# Altium PCB suntile.PcbDoc
Units mm, origin at the board's own origin, x right, y up, seen from the top; angles counter-clockwise.
Board outline 63 x 33.05 mm, 2 copper layers (Top Layer, Bottom Layer), stack 0.325 mm thick; 140 components, 34 nets, 335 pads, 200 vias.
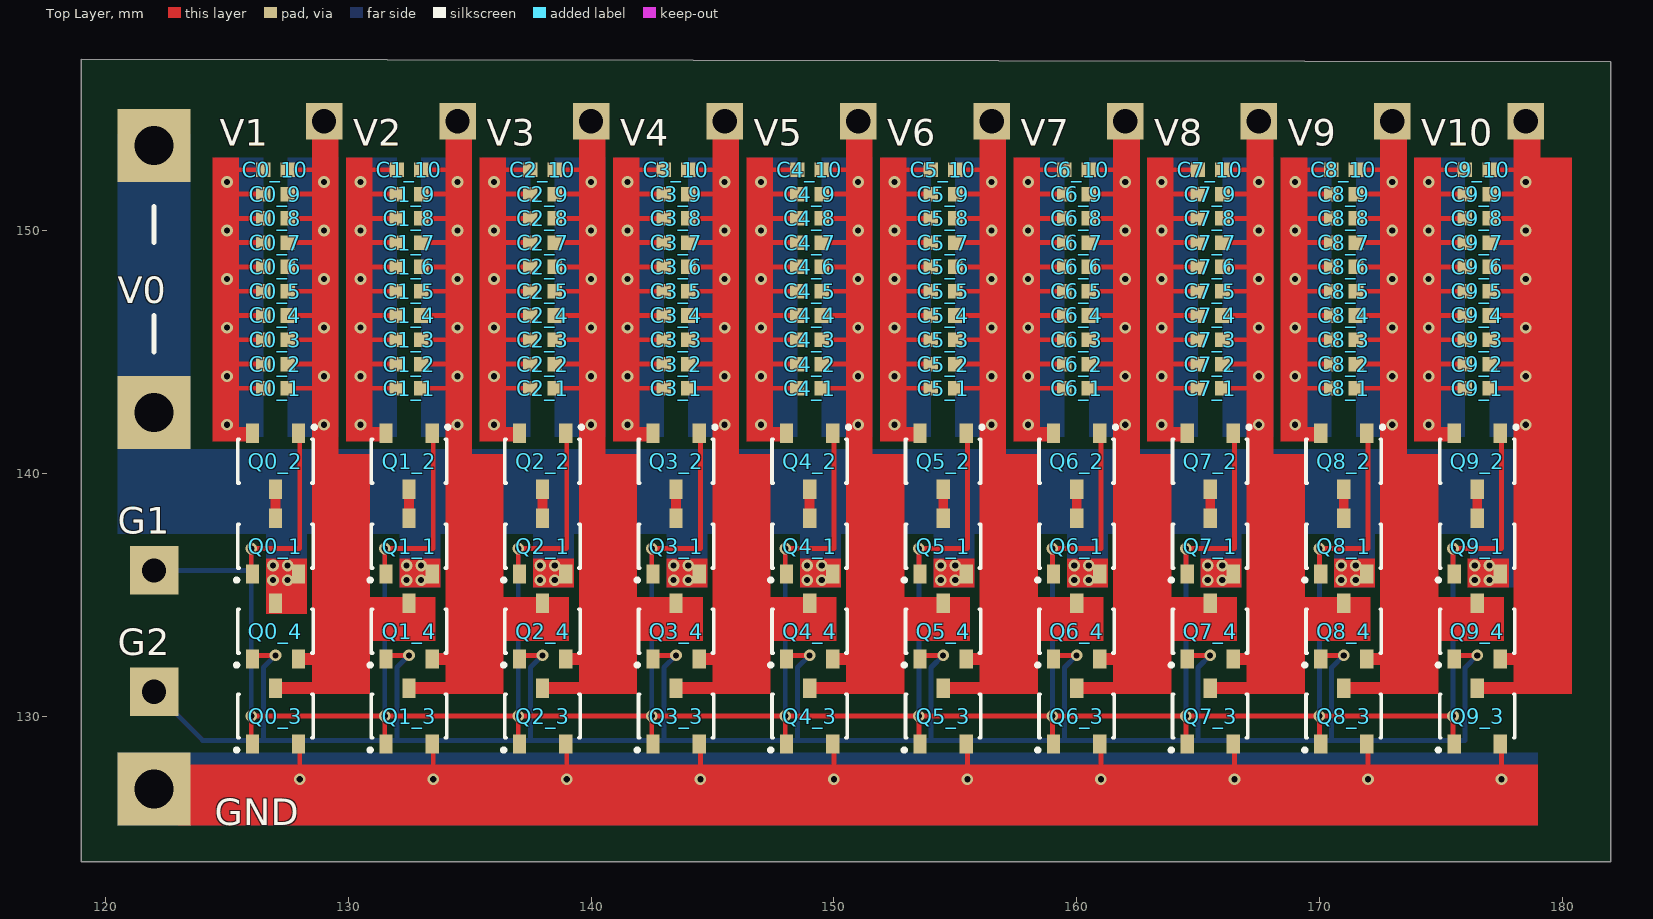
[diagram p0: Top Layer view]
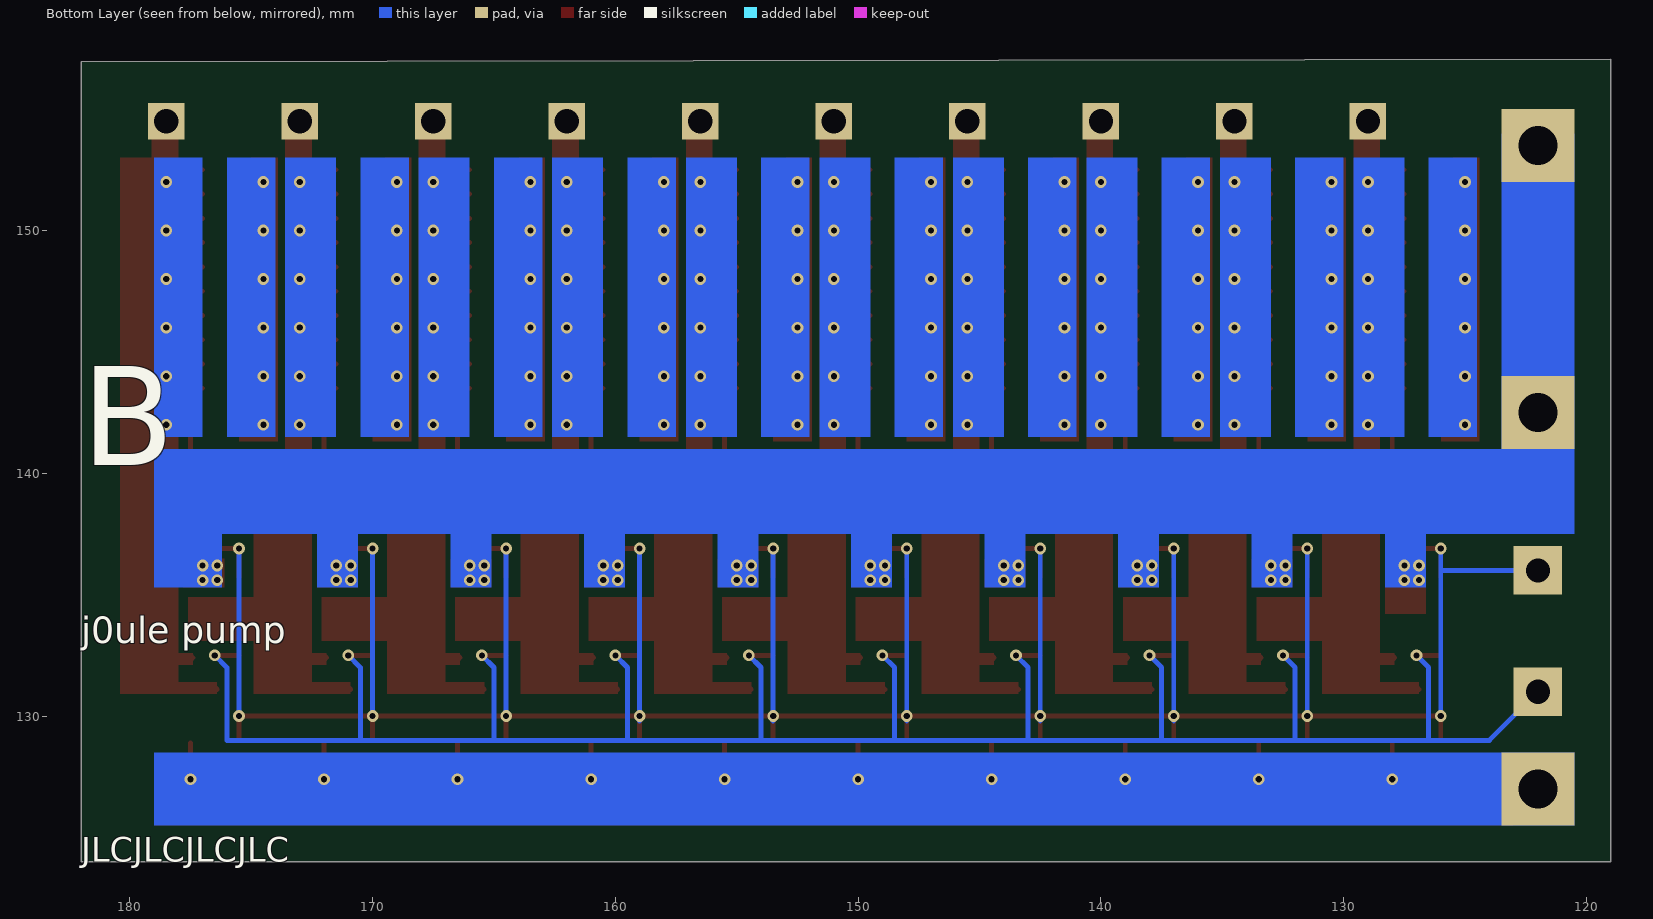
[diagram p1: Bottom Layer view, seen from below]
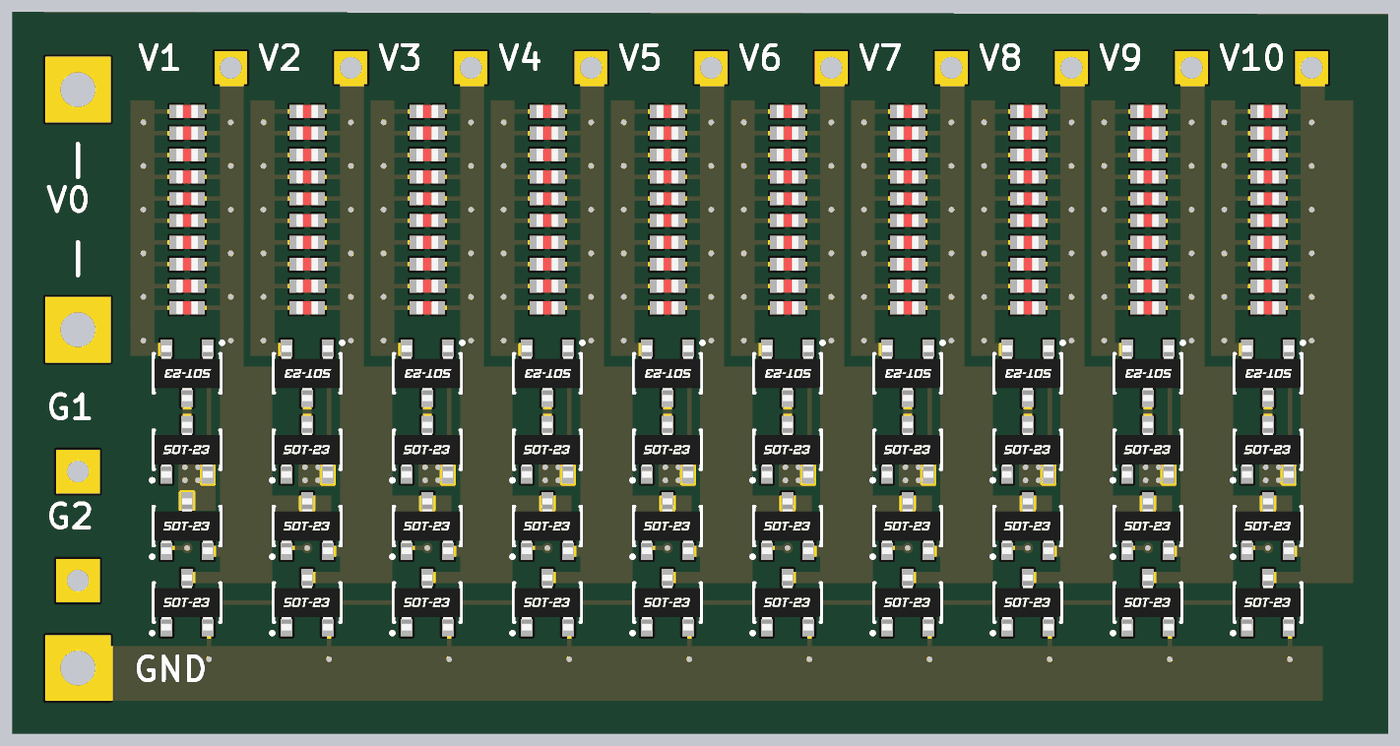
[diagram p2: 3D render of the assembled board from above, using the file's embedded part models]

## Layer stack, top to bottom
Top Solder: solder mask 0.0102, Solder Resist, Dk 3.5
Top Layer: signal copper 0.0356
Dielectric 1: core 0.254, FR-4, Dk 4.2
Bottom Layer: signal copper 0.0356
Bottom Solder: solder mask 0.0102, Solder Resist, Dk 3.5

## Board outline
119,124 182,124 182,156.951 119,157.054

## Design rules (kind name [scope] priority, off if disabled: settings)
Clearance [All] p1: gap=0.2 ignorepadtopadclearanceinfootprint=FALSE except(0: Arc-Hole Track-Hole SMDPad-Hole THPad-Hole Via-Hole Fill-Hole Poly-Hole Region-Hole Text-Hole)
PolygonConnect [All] p1: thpad.connectstyle=Relief thpad.reliefconductorwidth=0.254 thpad.reliefentries=4 thpad.polygonreliefangle="90 Angle" thpad.airgapwidth=0.254 smdpad.connectstyle=Relief smdpad.reliefconductorwidth=0.254 smdpad.reliefentries=4 smdpad.polygonreliefangle="90 Angle" smdpad.airgapwidth=0.254 via.connectstyle=Direct via.reliefconductorwidth=0.254 via.reliefentries=4 via.polygonreliefangle="90 Angle" via.airgapwidth=0.254
RoutingVias [All] p1: holewidth=0.711 width=1.27 viastyle="Through Hole" minholewidth=0.711 minwidth=1.27 maxholewidth=0.711 maxwidth=1.27
SolderMaskExpansion [All] p1: expansion=0.102
Width [All] p1: maxlimit=1 minlimit=0.2 preferedwidth=0.2 minimp=50.000000 maximp=50.000000 favimp=50.000000
30 further rules are at their usual default settings.

## Components (designator, comment, footprint, x,y, rotation, side; value= is the part's Value field where it differs from the comment)
C0_1 "CL05A106MQ5NUNC" C_0402 127,143.5 r180 top value=10uF
C0_2 "CL05A106MQ5NUNC" C_0402 127,144.5 r180 top value=10uF
C0_3 "CL05A106MQ5NUNC" C_0402 127,145.5 r180 top value=10uF
C0_4 "CL05A106MQ5NUNC" C_0402 127,146.5 r180 top value=10uF
C0_5 "CL05A106MQ5NUNC" C_0402 127,147.5 r180 top value=10uF
C0_6 "CL05A106MQ5NUNC" C_0402 127,148.5 r180 top value=10uF
C0_7 "CL05A106MQ5NUNC" C_0402 127,149.5 r180 top value=10uF
C0_8 "CL05A106MQ5NUNC" C_0402 127,150.5 r180 top value=10uF
C0_9 "CL05A106MQ5NUNC" C_0402 127,151.5 r180 top value=10uF
C0_10 "CL05A106MQ5NUNC" C_0402 127,152.5 r180 top value=10uF
C1_1 "CL05A106MQ5NUNC" C_0402 132.5,143.5 r180 top value=10uF
C1_2 "CL05A106MQ5NUNC" C_0402 132.5,144.5 r180 top value=10uF
C1_3 "CL05A106MQ5NUNC" C_0402 132.5,145.5 r180 top value=10uF
C1_4 "CL05A106MQ5NUNC" C_0402 132.5,146.5 r180 top value=10uF
C1_5 "CL05A106MQ5NUNC" C_0402 132.5,147.5 r180 top value=10uF
C1_6 "CL05A106MQ5NUNC" C_0402 132.5,148.5 r180 top value=10uF
C1_7 "CL05A106MQ5NUNC" C_0402 132.5,149.5 r180 top value=10uF
C1_8 "CL05A106MQ5NUNC" C_0402 132.5,150.5 r180 top value=10uF
C1_9 "CL05A106MQ5NUNC" C_0402 132.5,151.5 r180 top value=10uF
C1_10 "CL05A106MQ5NUNC" C_0402 132.5,152.5 r180 top value=10uF
C2_1 "CL05A106MQ5NUNC" C_0402 138,143.5 r180 top value=10uF
C2_2 "CL05A106MQ5NUNC" C_0402 138,144.5 r180 top value=10uF
C2_3 "CL05A106MQ5NUNC" C_0402 138,145.5 r180 top value=10uF
C2_4 "CL05A106MQ5NUNC" C_0402 138,146.5 r180 top value=10uF
C2_5 "CL05A106MQ5NUNC" C_0402 138,147.5 r180 top value=10uF
C2_6 "CL05A106MQ5NUNC" C_0402 138,148.5 r180 top value=10uF
C2_7 "CL05A106MQ5NUNC" C_0402 138,149.5 r180 top value=10uF
C2_8 "CL05A106MQ5NUNC" C_0402 138,150.5 r180 top value=10uF
C2_9 "CL05A106MQ5NUNC" C_0402 138,151.5 r180 top value=10uF
C2_10 "CL05A106MQ5NUNC" C_0402 138,152.5 r180 top value=10uF
C3_1 "CL05A106MQ5NUNC" C_0402 143.5,143.5 r180 top value=10uF
C3_2 "CL05A106MQ5NUNC" C_0402 143.5,144.5 r180 top value=10uF
C3_3 "CL05A106MQ5NUNC" C_0402 143.5,145.5 r180 top value=10uF
C3_4 "CL05A106MQ5NUNC" C_0402 143.5,146.5 r180 top value=10uF
C3_5 "CL05A106MQ5NUNC" C_0402 143.5,147.5 r180 top value=10uF
C3_6 "CL05A106MQ5NUNC" C_0402 143.5,148.5 r180 top value=10uF
C3_7 "CL05A106MQ5NUNC" C_0402 143.5,149.5 r180 top value=10uF
C3_8 "CL05A106MQ5NUNC" C_0402 143.5,150.5 r180 top value=10uF
C3_9 "CL05A106MQ5NUNC" C_0402 143.5,151.5 r180 top value=10uF
C3_10 "CL05A106MQ5NUNC" C_0402 143.5,152.5 r180 top value=10uF
C4_1 "CL05A106MQ5NUNC" C_0402 149,143.5 r180 top value=10uF
C4_2 "CL05A106MQ5NUNC" C_0402 149,144.5 r180 top value=10uF
C4_3 "CL05A106MQ5NUNC" C_0402 149,145.5 r180 top value=10uF
C4_4 "CL05A106MQ5NUNC" C_0402 149,146.5 r180 top value=10uF
C4_5 "CL05A106MQ5NUNC" C_0402 149,147.5 r180 top value=10uF
C4_6 "CL05A106MQ5NUNC" C_0402 149,148.5 r180 top value=10uF
C4_7 "CL05A106MQ5NUNC" C_0402 149,149.5 r180 top value=10uF
C4_8 "CL05A106MQ5NUNC" C_0402 149,150.5 r180 top value=10uF
C4_9 "CL05A106MQ5NUNC" C_0402 149,151.5 r180 top value=10uF
C4_10 "CL05A106MQ5NUNC" C_0402 149,152.5 r180 top value=10uF
C5_1 "CL05A106MQ5NUNC" C_0402 154.5,143.5 r180 top value=10uF
C5_2 "CL05A106MQ5NUNC" C_0402 154.5,144.5 r180 top value=10uF
C5_3 "CL05A106MQ5NUNC" C_0402 154.5,145.5 r180 top value=10uF
C5_4 "CL05A106MQ5NUNC" C_0402 154.5,146.5 r180 top value=10uF
C5_5 "CL05A106MQ5NUNC" C_0402 154.5,147.5 r180 top value=10uF
C5_6 "CL05A106MQ5NUNC" C_0402 154.5,148.5 r180 top value=10uF
C5_7 "CL05A106MQ5NUNC" C_0402 154.5,149.5 r180 top value=10uF
C5_8 "CL05A106MQ5NUNC" C_0402 154.5,150.5 r180 top value=10uF
C5_9 "CL05A106MQ5NUNC" C_0402 154.5,151.5 r180 top value=10uF
C5_10 "CL05A106MQ5NUNC" C_0402 154.5,152.5 r180 top value=10uF
C6_1 "CL05A106MQ5NUNC" C_0402 160,143.5 r180 top value=10uF
C6_2 "CL05A106MQ5NUNC" C_0402 160,144.5 r180 top value=10uF
C6_3 "CL05A106MQ5NUNC" C_0402 160,145.5 r180 top value=10uF
C6_4 "CL05A106MQ5NUNC" C_0402 160,146.5 r180 top value=10uF
C6_5 "CL05A106MQ5NUNC" C_0402 160,147.5 r180 top value=10uF
C6_6 "CL05A106MQ5NUNC" C_0402 160,148.5 r180 top value=10uF
C6_7 "CL05A106MQ5NUNC" C_0402 160,149.5 r180 top value=10uF
C6_8 "CL05A106MQ5NUNC" C_0402 160,150.5 r180 top value=10uF
C6_9 "CL05A106MQ5NUNC" C_0402 160,151.5 r180 top value=10uF
C6_10 "CL05A106MQ5NUNC" C_0402 160,152.5 r180 top value=10uF
C7_1 "CL05A106MQ5NUNC" C_0402 165.5,143.5 r180 top value=10uF
C7_2 "CL05A106MQ5NUNC" C_0402 165.5,144.5 r180 top value=10uF
C7_3 "CL05A106MQ5NUNC" C_0402 165.5,145.5 r180 top value=10uF
C7_4 "CL05A106MQ5NUNC" C_0402 165.5,146.5 r180 top value=10uF
C7_5 "CL05A106MQ5NUNC" C_0402 165.5,147.5 r180 top value=10uF
C7_6 "CL05A106MQ5NUNC" C_0402 165.5,148.5 r180 top value=10uF
C7_7 "CL05A106MQ5NUNC" C_0402 165.5,149.5 r180 top value=10uF
C7_8 "CL05A106MQ5NUNC" C_0402 165.5,150.5 r180 top value=10uF
C7_9 "CL05A106MQ5NUNC" C_0402 165.5,151.5 r180 top value=10uF
C7_10 "CL05A106MQ5NUNC" C_0402 165.5,152.5 r180 top value=10uF
C8_1 "CL05A106MQ5NUNC" C_0402 171,143.5 r180 top value=10uF
C8_2 "CL05A106MQ5NUNC" C_0402 171,144.5 r180 top value=10uF
C8_3 "CL05A106MQ5NUNC" C_0402 171,145.5 r180 top value=10uF
C8_4 "CL05A106MQ5NUNC" C_0402 171,146.5 r180 top value=10uF
C8_5 "CL05A106MQ5NUNC" C_0402 171,147.5 r180 top value=10uF
C8_6 "CL05A106MQ5NUNC" C_0402 171,148.5 r180 top value=10uF
C8_7 "CL05A106MQ5NUNC" C_0402 171,149.5 r180 top value=10uF
C8_8 "CL05A106MQ5NUNC" C_0402 171,150.5 r180 top value=10uF
C8_9 "CL05A106MQ5NUNC" C_0402 171,151.5 r180 top value=10uF
C8_10 "CL05A106MQ5NUNC" C_0402 171,152.5 r180 top value=10uF
C9_1 "CL05A106MQ5NUNC" C_0402 176.5,143.5 r180 top value=10uF
C9_2 "CL05A106MQ5NUNC" C_0402 176.5,144.5 r180 top value=10uF
C9_3 "CL05A106MQ5NUNC" C_0402 176.5,145.5 r180 top value=10uF
C9_4 "CL05A106MQ5NUNC" C_0402 176.5,146.5 r180 top value=10uF
C9_5 "CL05A106MQ5NUNC" C_0402 176.5,147.5 r180 top value=10uF
C9_6 "CL05A106MQ5NUNC" C_0402 176.5,148.5 r180 top value=10uF
C9_7 "CL05A106MQ5NUNC" C_0402 176.5,149.5 r180 top value=10uF
C9_8 "CL05A106MQ5NUNC" C_0402 176.5,150.5 r180 top value=10uF
C9_9 "CL05A106MQ5NUNC" C_0402 176.5,151.5 r180 top value=10uF
C9_10 "CL05A106MQ5NUNC" C_0402 176.5,152.5 r180 top value=10uF
Q0_1 "2N7002" TO-236AB 127,137 r90 top
Q0_2 "2N7002" TO-236AB 127,140.5 r270 top
Q0_3 "2N7002" TO-236AB 127,130 r90 top
Q0_4 "2N7002" TO-236AB 127,133.5 r90 top
Q1_1 "2N7002" TO-236AB 132.5,137 r90 top
Q1_2 "2N7002" TO-236AB 132.5,140.5 r270 top
Q1_3 "2N7002" TO-236AB 132.5,130 r90 top
Q1_4 "2N7002" TO-236AB 132.5,133.5 r90 top
Q2_1 "2N7002" TO-236AB 138,137 r90 top
Q2_2 "2N7002" TO-236AB 138,140.5 r270 top
Q2_3 "2N7002" TO-236AB 138,130 r90 top
Q2_4 "2N7002" TO-236AB 138,133.5 r90 top
Q3_1 "2N7002" TO-236AB 143.5,137 r90 top
Q3_2 "2N7002" TO-236AB 143.5,140.5 r270 top
Q3_3 "2N7002" TO-236AB 143.5,130 r90 top
Q3_4 "2N7002" TO-236AB 143.5,133.5 r90 top
Q4_1 "2N7002" TO-236AB 149,137 r90 top
Q4_2 "2N7002" TO-236AB 149,140.5 r270 top
Q4_3 "2N7002" TO-236AB 149,130 r90 top
Q4_4 "2N7002" TO-236AB 149,133.5 r90 top
Q5_1 "2N7002" TO-236AB 154.5,137 r90 top
Q5_2 "2N7002" TO-236AB 154.5,140.5 r270 top
Q5_3 "2N7002" TO-236AB 154.5,130 r90 top
Q5_4 "2N7002" TO-236AB 154.5,133.5 r90 top
Q6_1 "2N7002" TO-236AB 160,137 r90 top
Q6_2 "2N7002" TO-236AB 160,140.5 r270 top
Q6_3 "2N7002" TO-236AB 160,130 r90 top
Q6_4 "2N7002" TO-236AB 160,133.5 r90 top
Q7_1 "2N7002" TO-236AB 165.5,137 r90 top
Q7_2 "2N7002" TO-236AB 165.5,140.5 r270 top
Q7_3 "2N7002" TO-236AB 165.5,130 r90 top
Q7_4 "2N7002" TO-236AB 165.5,133.5 r90 top
Q8_1 "2N7002" TO-236AB 171,137 r90 top
Q8_2 "2N7002" TO-236AB 171,140.5 r270 top
Q8_3 "2N7002" TO-236AB 171,130 r90 top
Q8_4 "2N7002" TO-236AB 171,133.5 r90 top
Q9_1 "2N7002" TO-236AB 176.5,137 r90 top
Q9_2 "2N7002" TO-236AB 176.5,140.5 r270 top
Q9_3 "2N7002" TO-236AB 176.5,130 r90 top
Q9_4 "2N7002" TO-236AB 176.5,133.5 r90 top

## Footprints (in the part's own frame and the unit in brackets; to place one, negate y for a bottom-side part, rotate by r counter-clockwise, add the part's x,y. Pads: shape width x height; smd on the part's side, far side on the other; paste and mask are expansions set on the pad)
C_0402 [mm] "Chip Capacitor; Body 1.0 x 0.5 mm (LxW typ)"
  rect 0.6x0.6 smd: 1(-0.508,0) 2(0.508,0)
  body extent -0.5,-0.3 0.5,0.3, height 0.2
TO-236AB [mm] "SOT-23-3 Leads; Body 3.1 x 3 mm, inc. leads (LxW max)"
  rect 0.8x0.55 smd: 1(-1.15,0.95) 2(-1.15,-0.95) 3(1.15,0)
  silkscreen extent -1.45,-1.55 0.9,1.65, body extent -1.28,-1.5 1.27,1.5, height 1

## Part data
C0_1 C0_2 C0_3 C0_4 C0_5 C0_6 C0_7 C0_8 C0_9 C0_10 C1_1 C1_2 C1_3 C1_4 C1_5 C1_6 C1_7 C1_8 C1_9 C1_10 C2_1 C2_2 C2_3 C2_4 C2_5 C2_6 C2_7 C2_8 C2_9 C2_10 C3_1 C3_2 C3_3 C3_4 C3_5 C3_6 C3_7 C3_8 C3_9 C3_10 C4_1 C4_2 C4_3 C4_4 C4_5 C4_6 C4_7 C4_8 C4_9 C4_10 C5_1 C5_2 C5_3 C5_4 C5_5 C5_6 C5_7 C5_8 C5_9 C5_10 C6_1 C6_2 C6_3 C6_4 C6_5 C6_6 C6_7 C6_8 C6_9 C6_10 C7_1 C7_2 C7_3 C7_4 C7_5 C7_6 C7_7 C7_8 C7_9 C7_10 C8_1 C8_2 C8_3 C8_4 C8_5 C8_6 C8_7 C8_8 C8_9 C8_10 C9_1 C9_2 C9_3 C9_4 C9_5 C9_6 C9_7 C9_8 C9_9 C9_10: "C - CAPACITOR - MLCC - 10uF - 6.3V - 0402", JLC Availability=Basic, LCSC Part #=C15525, WVDC=6.3
Q0_1 Q0_2 Q0_3 Q0_4 Q1_1 Q1_2 Q1_3 Q1_4 Q2_1 Q2_2 Q2_3 Q2_4 Q3_1 Q3_2 Q3_3 Q3_4 Q4_1 Q4_2 Q4_3 Q4_4 Q5_1 Q5_2 Q5_3 Q5_4 Q6_1 Q6_2 Q6_3 Q6_4 Q7_1 Q7_2 Q7_3 Q7_4 Q8_1 Q8_2 Q8_3 Q8_4 Q9_1 Q9_2 Q9_3 Q9_4: "Q - TRANSISTOR - MOSFET (N) - 60V - 200mW", JLC Availability=Basic, LCSC Part #=C8545, WVDC=60

## Free pads (board coordinates)
  rect 3x3 hole 1.6: M(122,127) M(122,142.5) M(122,153.5)
  rect 2x2 hole 1: M(122,131) M(122,136)
  rect 1.5x1.5 hole 1: M(129,154.5) M(134.5,154.5) M(140,154.5) M(145.5,154.5) M(151,154.5) M(156.5,154.5) M(162,154.5) M(167.5,154.5) M(173,154.5) M(178.5,154.5)

## Via types
v1: diameter 0.48, hole 0.254, Top Layer to Bottom Layer, tented both sides, 200 vias

## Nets (pads, with @x,y where several pads share a name; then routed paths per layer and width w, separated by ;. In a path a pad name is that pad's centre, name@x,y a point inside that pad or via, vN(x,y) a via of type N, cw(c..) or ccw(c..) an arc to the next point about the centre after c; other vN are vias at no path point)
G1: pad.M@122,136 Q0_1.1 Q0_2.1 Q0_3.1 Q1_1.1 Q1_2.1 Q1_3.1 Q2_1.1 Q2_2.1 Q2_3.1 Q3_1.1 Q3_2.1 Q3_3.1 Q4_1.1 Q4_2.1 Q4_3.1 Q5_1.1 Q5_2.1 Q5_3.1 Q6_1.1 Q6_2.1 Q6_3.1 Q7_1.1 Q7_2.1 Q7_3.1 Q8_1.1 Q8_2.1 Q8_3.1 Q9_1.1 Q9_2.1 Q9_3.1 | length 214.5
  Top Layer w0.2: Q0_3.1@126,129.1 v1@126,129.95 ; v1(126,130) v1(131.5,130) v1(137,130) v1(142.5,130) v1(148,130) v1(153.5,130) v1(159,130) v1(164.5,130) ; Q0_1.1@126,135.7 v1(126,136.9) 128,136.9 Q0_2.1@128,141.9 ; Q1_3.1@131.5,129.1 v1@131.5,129.95 ; Q1_1.1@131.5,135.7 v1(131.5,136.9) 133.5,136.9 Q1_2.1@133.5,141.9 ; Q2_3.1@137,129.1 v1@137,129.95 ; Q2_1.1@137,135.7 v1(137,136.9) 139,136.9 Q2_2.1@139,141.9 ; Q3_3.1@142.5,129.1 v1@142.5,129.95 ; Q3_1.1@142.5,135.7 v1(142.5,136.9) 144.5,136.9 Q3_2.1@144.5,141.9 ; Q4_3.1@148,129.1 v1@148,129.95 ; Q4_1.1@148,135.7 v1(148,136.9) 150,136.9 Q4_2.1@150,141.9 ; Q5_3.1@153.5,129.1 v1@153.5,129.95 ; Q5_1.1@153.5,135.7 v1(153.5,136.9) 155.5,136.9 Q5_2.1@155.5,141.9 ; Q6_3.1@159,129.1 v1@159,129.95 ; Q6_1.1@159,135.7 v1(159,136.9) 161,136.9 Q6_2.1@161,141.9 ; Q7_3.1@164.5,129 v1(164.5,130) ; Q7_1.1@164.5,135.7 v1(164.5,136.9) 166.5,136.9 Q7_2.1@166.5,141.9 ; Q8_3.1@170,129 v1(170,130) ; Q8_1.1@170,135.7 v1(170,136.9) 172,136.9 Q8_2.1@172,141.9 ; Q9_3.1@175.5,129 v1(175.5,130) v1(170,130) ; Q9_1.1@175.5,135.7 v1(175.5,136.9) 177.5,136.9 Q9_2.1@177.5,141.9 ; v1(164.5,130) v1(170,130)
  Bottom Layer w0.2: pad.M@122,136 126,136 ; v1(126,130) 126,135 v1(126,136.9) ; v1(131.5,130) v1(131.5,136.9) ; v1@137,129.8 v1(137,130) v1(137,136.9) ; v1@142.5,129.8 v1(142.5,130) v1(142.5,136.9) ; v1@148,129.8 v1(148,130) v1(148,136.9) ; v1@153.5,129.8 v1(153.5,130) v1(153.5,136.9) ; v1@159,129.8 v1(159,130) v1(159,136.9) ; v1(164.5,130) v1(164.5,136.9) ; v1(170,130) v1(170,136.9) ; v1(175.5,130) v1(175.5,136.9)
G2: pad.M@122,131 Q0_4.1 Q1_4.1 Q2_4.1 Q3_4.1 Q4_4.1 Q5_4.1 Q6_4.1 Q7_4.1 Q8_4.1 Q9_4.1 | length 101.9
  Top Layer w0.2: Q0_4.1@126,132.5 v1(127,132.5) ; Q1_4.1@131.5,132.4 131.6,132.5 v1(132.5,132.5) ; Q2_4.1@137,132.5 v1(138,132.5) ; Q3_4.1@142.5,132.5 v1(143.5,132.5) ; Q4_4.1@148,132.5 v1(149,132.5) ; Q5_4.1@153.5,132.5 v1(154.5,132.5) ; Q6_4.1@159,132.5 v1(160,132.5) ; Q7_4.1@164.5,132.5 v1(165.5,132.5) ; Q8_4.1@170,132.5 v1(171,132.5) ; Q9_4.1@175.5,132.5 v1(176.5,132.5)
  Bottom Layer w0.2: pad.M@122,131 124,129 126.5,129 ; v1(127,132.5) 126.5,132 126.5,129 ; v1(132.5,132.5) 132,132 132,129 ; v1(138,132.5) 137.5,132 137.5,129 ; v1(143.5,132.5) 143,132 143,129 ; v1(149,132.5) 148.5,132 148.5,129 ; v1(154.5,132.5) 154,132 154,129 ; v1(160,132.5) 159.5,132 159.5,129 ; v1(165.5,132.5) 165,132 165,129 ; v1(171,132.5) 170.5,132 170.5,129 ; v1(176.5,132.5) 176,132 176,129 170.5,129 ; 126.5,129 132,129 ; 132,129 137.5,129 ; 137.5,129 143,129 ; 143,129 148.5,129 ; 148.5,129 154,129 ; 154,129 159.5,129 ; 159.5,129 165,129 ; 165,129 170.5,129
GND: pad.M@122,127 Q0_3.2 Q1_3.2 Q2_3.2 Q3_3.2 Q4_3.2 Q5_3.2 Q6_3.2 Q7_3.2 Q8_3.2 Q9_3.2 | length 10
  Top Layer w0.2: 128,127.9 Q0_3.2@128,128.9 ; 133.5,127.9 Q1_3.2@133.5,128.9 ; 139,127.9 Q2_3.2@139,128.9 ; 144.5,127.9 Q3_3.2@144.5,128.9 ; 150,127.9 Q4_3.2@150,128.9 ; 155.5,127.9 Q5_3.2@155.5,128.9 ; 161,127.9 Q6_3.2@161,128.9 ; 166.5,127.9 Q7_3.2@166.5,128.9 ; 172,127.9 Q8_3.2@172,128.9 ; 177.5,127.9 Q9_3.2@177.5,128.9
  other v1: 128,127.4 133.5,127.4 139,127.4 144.5,127.4 150,127.4 155.5,127.4 161,127.4 166.5,127.4 172,127.4 177.5,127.4
NetC0_1_2: C0_1.2 C0_2.2 C0_3.2 C0_4.2 C0_5.2 C0_6.2 C0_7.2 C0_8.2 C0_9.2 C0_10.2 Q0_2.2 | length 20.1
  Top Layer w0.2: v1@125.2,144 125.2,141.7 125.9,141.7 Q0_2.2@125.9,141.9 ; 125.2,151.5 C0_9.2@126.192,151.5 ; 125.2,152.5 C0_10.2@126.192,152.5 ; C0_1.2@126.192,143.5 125.2,143.5 125.2,144.5 ; C0_2.2@126.192,144.5 125.2,144.5 ; C0_3.2@126.192,145.5 125.2,145.5 ; C0_4.2@126.192,146.5 125.2,146.5 ; C0_5.2@126.192,147.5 125.2,147.5 ; C0_6.2@126.192,148.5 125.2,148.5 ; C0_7.2@126.192,149.5 125.2,149.5 ; C0_8.2@126.192,150.5 125.2,150.5 125.2,149.5 ; 125.2,144.5 125.2,145.5 ; 125.2,145.5 125.2,146.5 ; 125.2,146.5 125.2,147.5 ; 125.2,147.5 125.2,148.5 ; 125.2,148.5 125.2,149.5
  other v1: 125,142 125,144 125,146 125,148 125,150 125,152
NetC1_1_2: C1_1.2 C1_2.2 C1_3.2 C1_4.2 C1_5.2 C1_6.2 C1_7.2 C1_8.2 C1_9.2 C1_10.2 Q1_2.2 | length 20.1
  Top Layer w0.2: v1@130.7,144 130.7,141.7 131.4,141.7 Q1_2.2@131.4,141.9 ; 130.7,151.5 C1_9.2@131.692,151.5 ; 130.7,152.5 C1_10.2@131.692,152.5 ; C1_1.2@131.692,143.5 130.7,143.5 130.7,144.5 ; C1_2.2@131.692,144.5 130.7,144.5 ; C1_3.2@131.692,145.5 130.7,145.5 ; C1_4.2@131.692,146.5 130.7,146.5 ; C1_5.2@131.692,147.5 130.7,147.5 ; C1_6.2@131.692,148.5 130.7,148.5 ; C1_7.2@131.692,149.5 130.7,149.5 ; C1_8.2@131.692,150.5 130.7,150.5 130.7,149.5 ; 130.7,144.5 130.7,145.5 ; 130.7,145.5 130.7,146.5 ; 130.7,146.5 130.7,147.5 ; 130.7,147.5 130.7,148.5 ; 130.7,148.5 130.7,149.5
  other v1: 130.5,142 130.5,144 130.5,146 130.5,148 130.5,150 130.5,152
NetC2_1_2: C2_1.2 C2_2.2 C2_3.2 C2_4.2 C2_5.2 C2_6.2 C2_7.2 C2_8.2 C2_9.2 C2_10.2 Q2_2.2 | length 20.1
  Top Layer w0.2: v1@136.2,144 136.2,141.7 136.9,141.7 Q2_2.2@136.9,141.9 ; 136.2,151.5 C2_9.2@137.192,151.5 ; 136.2,152.5 C2_10.2@137.192,152.5 ; C2_1.2@137.192,143.5 136.2,143.5 136.2,144.5 ; C2_2.2@137.192,144.5 136.2,144.5 ; C2_3.2@137.192,145.5 136.2,145.5 ; C2_4.2@137.192,146.5 136.2,146.5 ; C2_5.2@137.192,147.5 136.2,147.5 ; C2_6.2@137.192,148.5 136.2,148.5 ; C2_7.2@137.192,149.5 136.2,149.5 ; C2_8.2@137.192,150.5 136.2,150.5 136.2,149.5 ; 136.2,144.5 136.2,145.5 ; 136.2,145.5 136.2,146.5 ; 136.2,146.5 136.2,147.5 ; 136.2,147.5 136.2,148.5 ; 136.2,148.5 136.2,149.5
  other v1: 136,142 136,144 136,146 136,148 136,150 136,152
NetC3_1_2: C3_1.2 C3_2.2 C3_3.2 C3_4.2 C3_5.2 C3_6.2 C3_7.2 C3_8.2 C3_9.2 C3_10.2 Q3_2.2 | length 20.1
  Top Layer w0.2: v1@141.7,144 141.7,141.7 142.4,141.7 Q3_2.2@142.4,141.9 ; 141.7,151.5 C3_9.2@142.692,151.5 ; 141.7,152.5 C3_10.2@142.692,152.5 ; C3_1.2@142.692,143.5 141.7,143.5 141.7,144.5 ; C3_2.2@142.692,144.5 141.7,144.5 ; C3_3.2@142.692,145.5 141.7,145.5 ; C3_4.2@142.692,146.5 141.7,146.5 ; C3_5.2@142.692,147.5 141.7,147.5 ; C3_6.2@142.692,148.5 141.7,148.5 ; C3_7.2@142.692,149.5 141.7,149.5 ; C3_8.2@142.692,150.5 141.7,150.5 141.7,149.5 ; 141.7,144.5 141.7,145.5 ; 141.7,145.5 141.7,146.5 ; 141.7,146.5 141.7,147.5 ; 141.7,147.5 141.7,148.5 ; 141.7,148.5 141.7,149.5
  other v1: 141.5,142 141.5,144 141.5,146 141.5,148 141.5,150 141.5,152
NetC4_1_2: C4_1.2 C4_2.2 C4_3.2 C4_4.2 C4_5.2 C4_6.2 C4_7.2 C4_8.2 C4_9.2 C4_10.2 Q4_2.2 | length 20.1
  Top Layer w0.2: v1@147.2,144 147.2,141.7 147.9,141.7 Q4_2.2@147.9,141.9 ; 147.2,151.5 C4_9.2@148.192,151.5 ; 147.2,152.5 C4_10.2@148.192,152.5 ; C4_1.2@148.192,143.5 147.2,143.5 147.2,144.5 ; C4_2.2@148.192,144.5 147.2,144.5 ; C4_3.2@148.192,145.5 147.2,145.5 ; C4_4.2@148.192,146.5 147.2,146.5 ; C4_5.2@148.192,147.5 147.2,147.5 ; C4_6.2@148.192,148.5 147.2,148.5 ; C4_7.2@148.192,149.5 147.2,149.5 ; C4_8.2@148.192,150.5 147.2,150.5 147.2,149.5 ; 147.2,144.5 147.2,145.5 ; 147.2,145.5 147.2,146.5 ; 147.2,146.5 147.2,147.5 ; 147.2,147.5 147.2,148.5 ; 147.2,148.5 147.2,149.5
  other v1: 147,142 147,144 147,146 147,148 147,150 147,152
NetC5_1_2: C5_1.2 C5_2.2 C5_3.2 C5_4.2 C5_5.2 C5_6.2 C5_7.2 C5_8.2 C5_9.2 C5_10.2 Q5_2.2 | length 20.1
  Top Layer w0.2: v1@152.7,144 152.7,141.7 153.4,141.7 Q5_2.2@153.4,141.9 ; 152.7,151.5 C5_9.2@153.692,151.5 ; 152.7,152.5 C5_10.2@153.692,152.5 ; C5_1.2@153.692,143.5 152.7,143.5 152.7,144.5 ; C5_2.2@153.692,144.5 152.7,144.5 ; C5_3.2@153.692,145.5 152.7,145.5 ; C5_4.2@153.692,146.5 152.7,146.5 ; C5_5.2@153.692,147.5 152.7,147.5 ; C5_6.2@153.692,148.5 152.7,148.5 ; C5_7.2@153.692,149.5 152.7,149.5 ; C5_8.2@153.692,150.5 152.7,150.5 152.7,149.5 ; 152.7,144.5 152.7,145.5 ; 152.7,145.5 152.7,146.5 ; 152.7,146.5 152.7,147.5 ; 152.7,147.5 152.7,148.5 ; 152.7,148.5 152.7,149.5
  other v1: 152.5,142 152.5,144 152.5,146 152.5,148 152.5,150 152.5,152
NetC6_1_2: C6_1.2 C6_2.2 C6_3.2 C6_4.2 C6_5.2 C6_6.2 C6_7.2 C6_8.2 C6_9.2 C6_10.2 Q6_2.2 | length 20.1
  Top Layer w0.2: v1@158.2,144 158.2,141.7 158.9,141.7 Q6_2.2@158.9,141.9 ; 158.2,151.5 C6_9.2@159.192,151.5 ; 158.2,152.5 C6_10.2@159.192,152.5 ; C6_1.2@159.192,143.5 158.2,143.5 158.2,144.5 ; C6_2.2@159.192,144.5 158.2,144.5 ; C6_3.2@159.192,145.5 158.2,145.5 ; C6_4.2@159.192,146.5 158.2,146.5 ; C6_5.2@159.192,147.5 158.2,147.5 ; C6_6.2@159.192,148.5 158.2,148.5 ; C6_7.2@159.192,149.5 158.2,149.5 ; C6_8.2@159.192,150.5 158.2,150.5 158.2,149.5 ; 158.2,144.5 158.2,145.5 ; 158.2,145.5 158.2,146.5 ; 158.2,146.5 158.2,147.5 ; 158.2,147.5 158.2,148.5 ; 158.2,148.5 158.2,149.5
  other v1: 158,142 158,144 158,146 158,148 158,150 158,152
NetC7_1_2: C7_1.2 C7_2.2 C7_3.2 C7_4.2 C7_5.2 C7_6.2 C7_7.2 C7_8.2 C7_9.2 C7_10.2 Q7_2.2 | length 20.1
  Top Layer w0.2: v1@163.7,144 163.7,141.7 164.4,141.7 Q7_2.2@164.4,141.9 ; 163.7,151.5 C7_9.2@164.692,151.5 ; 163.7,152.5 C7_10.2@164.692,152.5 ; C7_1.2@164.692,143.5 163.7,143.5 163.7,144.5 ; C7_2.2@164.692,144.5 163.7,144.5 ; C7_3.2@164.692,145.5 163.7,145.5 ; C7_4.2@164.692,146.5 163.7,146.5 ; C7_5.2@164.692,147.5 163.7,147.5 ; C7_6.2@164.692,148.5 163.7,148.5 ; C7_7.2@164.692,149.5 163.7,149.5 ; C7_8.2@164.692,150.5 163.7,150.5 163.7,149.5 ; 163.7,144.5 163.7,145.5 ; 163.7,145.5 163.7,146.5 ; 163.7,146.5 163.7,147.5 ; 163.7,147.5 163.7,148.5 ; 163.7,148.5 163.7,149.5
  other v1: 163.5,142 163.5,144 163.5,146 163.5,148 163.5,150 163.5,152
NetC8_1_2: C8_1.2 C8_2.2 C8_3.2 C8_4.2 C8_5.2 C8_6.2 C8_7.2 C8_8.2 C8_9.2 C8_10.2 Q8_2.2 | length 20.1
  Top Layer w0.2: v1@169.2,144 169.2,141.7 169.9,141.7 Q8_2.2@169.9,141.9 ; 169.2,151.5 C8_9.2@170.192,151.5 ; 169.2,152.5 C8_10.2@170.192,152.5 ; C8_1.2@170.192,143.5 169.2,143.5 169.2,144.5 ; C8_2.2@170.192,144.5 169.2,144.5 ; C8_3.2@170.192,145.5 169.2,145.5 ; C8_4.2@170.192,146.5 169.2,146.5 ; C8_5.2@170.192,147.5 169.2,147.5 ; C8_6.2@170.192,148.5 169.2,148.5 ; C8_7.2@170.192,149.5 169.2,149.5 ; C8_8.2@170.192,150.5 169.2,150.5 169.2,149.5 ; 169.2,144.5 169.2,145.5 ; 169.2,145.5 169.2,146.5 ; 169.2,146.5 169.2,147.5 ; 169.2,147.5 169.2,148.5 ; 169.2,148.5 169.2,149.5
  other v1: 169,142 169,144 169,146 169,148 169,150 169,152
NetC9_1_2: C9_1.2 C9_2.2 C9_3.2 C9_4.2 C9_5.2 C9_6.2 C9_7.2 C9_8.2 C9_9.2 C9_10.2 Q9_2.2 | length 20.1
  Top Layer w0.2: v1@174.7,144 174.7,141.7 175.4,141.7 Q9_2.2@175.4,141.9 ; 174.7,151.5 C9_9.2@175.692,151.5 ; 174.7,152.5 C9_10.2@175.692,152.5 ; C9_1.2@175.692,143.5 174.7,143.5 174.7,144.5 ; C9_2.2@175.692,144.5 174.7,144.5 ; C9_3.2@175.692,145.5 174.7,145.5 ; C9_4.2@175.692,146.5 174.7,146.5 ; C9_5.2@175.692,147.5 174.7,147.5 ; C9_6.2@175.692,148.5 174.7,148.5 ; C9_7.2@175.692,149.5 174.7,149.5 ; C9_8.2@175.692,150.5 174.7,150.5 174.7,149.5 ; 174.7,144.5 174.7,145.5 ; 174.7,145.5 174.7,146.5 ; 174.7,146.5 174.7,147.5 ; 174.7,147.5 174.7,148.5 ; 174.7,148.5 174.7,149.5
  other v1: 174.5,142 174.5,144 174.5,146 174.5,148 174.5,150 174.5,152
NetQ0_1_3: Q0_1.3 Q0_2.3 | length 0.2
  Top Layer w0.2: Q0_1.3@127,138 Q0_1.3
NetQ1_1_3: Q1_1.3 Q1_2.3 | length 0.2
  Top Layer w0.2: Q1_1.3@132.5,138 Q1_1.3
NetQ2_1_3: Q2_1.3 Q2_2.3 | length 0.2
  Top Layer w0.2: Q2_1.3@138,138 Q2_1.3
NetQ3_1_3: Q3_1.3 Q3_2.3 | length 0.2
  Top Layer w0.2: Q3_1.3@143.5,138 Q3_1.3
NetQ4_1_3: Q4_1.3 Q4_2.3 | length 0.2
  Top Layer w0.2: Q4_1.3@149,138 Q4_1.3
NetQ5_1_3: Q5_1.3 Q5_2.3 | length 0.2
  Top Layer w0.2: Q5_1.3@154.5,138 Q5_1.3
NetQ6_1_3: Q6_1.3 Q6_2.3 | length 0.2
  Top Layer w0.2: Q6_1.3@160,138 Q6_1.3
NetQ7_1_3: Q7_1.3 Q7_2.3 | length 0.2
  Top Layer w0.2: Q7_1.3@165.5,138 Q7_1.3
NetQ8_1_3: Q8_1.3 Q8_2.3 | length 0.2
  Top Layer w0.2: Q8_1.3@171,138 Q8_1.3
NetQ9_1_3: Q9_1.3 Q9_2.3 | length 0.2
  Top Layer w0.2: Q9_1.3@176.5,138 Q9_1.3
VCC_0: pad.M@122,142.5 pad.M@122,153.5 Q0_1.2 Q0_4.3 Q1_1.2 Q2_1.2 Q3_1.2 Q4_1.2 Q5_1.2 Q6_1.2 Q7_1.2 Q8_1.2 Q9_1.2
  other v1: 126.9,135.6 127.5,135.6 132.4,135.6 133,135.6 137.9,135.6 138.5,135.6 143.4,135.6 144,135.6 148.9,135.6 149.5,135.6 154.4,135.6 155,135.6 159.9,135.6 160.5,135.6 165.4,135.6 166,135.6 170.9,135.6 171.5,135.6 176.4,135.6 177,135.6 126.9,136.2 127.5,136.2 132.4,136.2 133,136.2 137.9,136.2 138.5,136.2 143.4,136.2 144,136.2 148.9,136.2 149.5,136.2 154.4,136.2 155,136.2 159.9,136.2 160.5,136.2 165.4,136.2 166,136.2 170.9,136.2 171.5,136.2 176.4,136.2 177,136.2
VCC_1: C0_1.1 C0_2.1 C0_3.1 C0_4.1 C0_5.1 C0_6.1 C0_7.1 C0_8.1 C0_9.1 C0_10.1 pad.M@129,154.5 Q0_3.3 Q0_4.2 Q1_4.3 | length 34.4
  Top Layer w0.2: Q0_3.3@126.9,131.1 127,131.2 128.8,131.2 128.8,132.3 ; C0_1.1 128.7,143.5 ; C0_2.1 128.7,144.5 ; C0_3.1 128.7,145.5 ; C0_4.1 128.7,146.5 ; C0_5.1 128.7,147.5 ; C0_6.1 128.7,148.5 ; C0_7.1 128.7,149.5 ; C0_8.1 128.7,150.5 ; C0_9.1 128.7,151.5 ; C0_10.1 128.7,152.5 ; Q0_4.2@127.9,132.4 128,132.5 Q0_4.2@128.1,132.5 ; Q0_4.2 128,132.3 128.8,132.3 ; 128.7,151 128.7,150 128.7,149 128.7,148 128.7,147 128.7,146 128.7,145 128.7,144 v1@128.8,143.9 ; 128.8,143.4 128.8,132.3 ; Q1_4.3@132.5,134.5 Q1_4.3@132.571,134.6
  other v1: 129,142 129,144 129,146 129,148 129,150 129,152
VCC_2: C1_1.1 C1_2.1 C1_3.1 C1_4.1 C1_5.1 C1_6.1 C1_7.1 C1_8.1 C1_9.1 C1_10.1 pad.M@134.5,154.5 Q1_3.3 Q1_4.2 Q2_4.3 | length 34.4
  Top Layer w0.2: Q1_3.3@132.4,131.1 132.5,131.2 134.3,131.2 134.3,132.3 ; C1_1.1 134.2,143.5 ; C1_2.1 134.2,144.5 ; C1_3.1 134.2,145.5 ; C1_4.1 134.2,146.5 ; C1_5.1 134.2,147.5 ; C1_6.1 134.2,148.5 ; C1_7.1 134.2,149.5 ; C1_8.1 134.2,150.5 134.2,149.5 ; C1_9.1 134.2,151.5 ; C1_10.1 134.2,152.5 ; Q1_4.2@133.4,132.4 133.5,132.5 Q1_4.2@133.6,132.5 ; Q1_4.2 133.5,132.3 134.3,132.3 ; Q2_4.3@138,134.5 Q2_4.3@138.071,134.6 ; 134.2,143.5 134.2,144.5 ; 134.2,143.5 134.3,143.4 134.3,132.3 ; 134.2,144.5 134.2,145.5 ; 134.2,145.5 134.2,146.5 ; 134.2,146.5 134.2,147.5 ; 134.2,147.5 134.2,148.5 ; 134.2,148.5 134.2,149.5
  other v1: 134.5,142 134.5,144 134.5,146 134.5,148 134.5,150 134.5,152
VCC_3: C2_1.1 C2_2.1 C2_3.1 C2_4.1 C2_5.1 C2_6.1 C2_7.1 C2_8.1 C2_9.1 C2_10.1 pad.M@140,154.5 Q2_3.3 Q2_4.2 Q3_4.3 | length 34.4
  Top Layer w0.2: Q2_3.3@137.9,131.1 138,131.2 139.8,131.2 139.8,132.3 ; C2_1.1 139.7,143.5 ; C2_2.1 139.7,144.5 ; C2_3.1 139.7,145.5 ; C2_4.1 139.7,146.5 ; C2_5.1 139.7,147.5 ; C2_6.1 139.7,148.5 ; C2_7.1 139.7,149.5 ; C2_8.1 139.7,150.5 139.7,149.5 ; C2_9.1 139.7,151.5 ; C2_10.1 139.7,152.5 ; Q2_4.2@138.9,132.4 139,132.5 Q2_4.2@139.1,132.5 ; Q2_4.2 139,132.3 139.8,132.3 ; Q3_4.3@143.5,134.5 Q3_4.3@143.571,134.6 ; 139.7,143.5 139.7,144.5 ; 139.7,143.5 139.8,143.4 139.8,132.3 ; 139.7,144.5 139.7,145.5 ; 139.7,145.5 139.7,146.5 ; 139.7,146.5 139.7,147.5 ; 139.7,147.5 139.7,148.5 ; 139.7,148.5 139.7,149.5
  other v1: 140,142 140,144 140,146 140,148 140,150 140,152
VCC_4: C3_1.1 C3_2.1 C3_3.1 C3_4.1 C3_5.1 C3_6.1 C3_7.1 C3_8.1 C3_9.1 C3_10.1 pad.M@145.5,154.5 Q3_3.3 Q3_4.2 Q4_4.3 | length 34.3
  Top Layer w0.2: Q3_3.3@143.4,131.1 143.5,131.2 145.3,131.2 145.3,132.3 ; C3_1.1 145.2,143.5 ; C3_2.1 145.2,144.5 ; C3_3.1 145.2,145.5 ; C3_4.1 145.2,146.5 ; C3_5.1 145.2,147.5 ; C3_6.1 145.2,148.5 ; C3_7.1 145.2,149.5 ; C3_8.1 145.2,150.5 145.2,149.5 ; C3_9.1 145.2,151.5 ; C3_10.1 145.2,152.5 ; Q3_4.2@144.4,132.4 144.5,132.5 Q3_4.2@144.6,132.5 ; Q3_4.2 144.5,132.3 145.3,132.3 ; 145.2,143.5 145.3,143.4 145.3,132.3 ; 145.2,143.5 145.2,144.5 ; 145.2,144.5 145.2,145.5 ; 145.2,145.5 145.2,146.5 ; 145.2,146.5 145.2,147.5 ; 145.2,147.5 145.2,148.5 ; 145.2,148.5 145.2,149.5
  other v1: 145.5,142 145.5,144 145.5,146 145.5,148 145.5,150 145.5,152
VCC_5: C4_1.1 C4_2.1 C4_3.1 C4_4.1 C4_5.1 C4_6.1 C4_7.1 C4_8.1 C4_9.1 C4_10.1 pad.M@151,154.5 Q4_3.3 Q4_4.2 Q5_4.3 | length 34.4
  Top Layer w0.2: Q4_3.3@148.9,131.1 149,131.2 150.8,131.2 150.8,132.3 ; C4_1.1 150.7,143.5 ; C4_2.1 150.7,144.5 ; C4_3.1 150.7,145.5 ; C4_4.1 150.7,146.5 ; C4_5.1 150.7,147.5 ; C4_6.1 150.7,148.5 ; C4_7.1 150.7,149.5 ; C4_8.1 150.7,150.5 150.7,149.5 ; C4_9.1 150.7,151.5 ; C4_10.1 150.7,152.5 ; Q4_4.2@149.9,132.4 150,132.5 Q4_4.2@150.1,132.5 ; Q4_4.2 150,132.3 150.8,132.3 ; Q5_4.3@154.5,134.5 Q5_4.3@154.571,134.6 ; 150.7,143.5 150.8,143.4 150.8,132.3 ; 150.7,143.5 150.7,144.5 ; 150.7,144.5 150.7,145.5 ; 150.7,145.5 150.7,146.5 ; 150.7,146.5 150.7,147.5 ; 150.7,147.5 150.7,148.5 ; 150.7,148.5 150.7,149.5
  other v1: 151,142 151,144 151,146 151,148 151,150 151,152
VCC_6: C5_1.1 C5_2.1 C5_3.1 C5_4.1 C5_5.1 C5_6.1 C5_7.1 C5_8.1 C5_9.1 C5_10.1 pad.M@156.5,154.5 Q5_3.3 Q5_4.2 Q6_4.3 | length 34.4
  Top Layer w0.2: Q5_3.3@154.4,131.1 154.5,131.2 156.3,131.2 156.3,132.3 ; C5_1.1 156.2,143.5 ; C5_2.1 156.2,144.5 ; C5_3.1 156.2,145.5 ; C5_4.1 156.2,146.5 ; C5_5.1 156.2,147.5 ; C5_6.1 156.2,148.5 ; C5_7.1 156.2,149.5 ; C5_8.1 156.2,150.5 156.2,149.5 ; C5_9.1 156.2,151.5 ; C5_10.1 156.2,152.5 ; Q5_4.2@155.4,132.4 155.5,132.5 Q5_4.2@155.6,132.5 ; Q5_4.2 155.5,132.3 156.3,132.3 ; Q6_4.3@160,134.5 Q6_4.3@160.071,134.6 ; 156.2,143.5 156.3,143.4 156.3,132.3 ; 156.2,143.5 156.2,144.5 ; 156.2,144.5 156.2,145.5 ; 156.2,145.5 156.2,146.5 ; 156.2,146.5 156.2,147.5 ; 156.2,147.5 156.2,148.5 ; 156.2,148.5 156.2,149.5
  other v1: 156.5,142 156.5,144 156.5,146 156.5,148 156.5,150 156.5,152
VCC_7: C6_1.1 C6_2.1 C6_3.1 C6_4.1 C6_5.1 C6_6.1 C6_7.1 C6_8.1 C6_9.1 C6_10.1 pad.M@162,154.5 Q6_3.3 Q6_4.2 Q7_4.3 | length 34.4
  Top Layer w0.2: Q6_3.3@159.9,131.1 160,131.2 161.8,131.2 161.8,132.3 ; C6_1.1 161.7,143.5 ; C6_2.1 161.7,144.5 ; C6_3.1 161.7,145.5 ; C6_4.1 161.7,146.5 ; C6_5.1 161.7,147.5 ; C6_6.1 161.7,148.5 ; C6_7.1 161.7,149.5 ; C6_8.1 161.7,150.5 161.7,149.5 ; C6_9.1 161.7,151.5 ; C6_10.1 161.7,152.5 ; Q6_4.2@160.9,132.4 161,132.5 Q6_4.2@161.1,132.5 ; Q6_4.2 161,132.3 161.8,132.3 ; Q7_4.3@165.5,134.5 Q7_4.3@165.571,134.6 ; 161.7,143.5 161.7,144.5 ; 161.7,143.5 161.8,143.4 161.8,132.3 ; 161.7,144.5 161.7,145.5 ; 161.7,145.5 161.7,146.5 ; 161.7,146.5 161.7,147.5 ; 161.7,147.5 161.7,148.5 ; 161.7,148.5 161.7,149.5
  other v1: 162,142 162,144 162,146 162,148 162,150 162,152
VCC_8: C7_1.1 C7_2.1 C7_3.1 C7_4.1 C7_5.1 C7_6.1 C7_7.1 C7_8.1 C7_9.1 C7_10.1 pad.M@167.5,154.5 Q7_3.3 Q7_4.2 Q8_4.3 | length 34.4
  Top Layer w0.2: Q7_3.3@165.4,131.1 165.5,131.2 167.3,131.2 167.3,132.3 ; C7_1.1 167.2,143.5 ; C7_2.1 167.2,144.5 ; C7_3.1 167.2,145.5 ; C7_4.1 167.2,146.5 ; C7_5.1 167.2,147.5 ; C7_6.1 167.2,148.5 ; C7_7.1 167.2,149.5 ; C7_8.1 167.2,150.5 167.2,149.5 ; C7_9.1 167.2,151.5 ; C7_10.1 167.2,152.5 ; Q7_4.2@166.4,132.4 166.5,132.5 Q7_4.2@166.6,132.5 ; Q7_4.2 166.5,132.3 167.3,132.3 ; Q8_4.3@171,134.5 Q8_4.3@171.071,134.6 ; 167.2,143.5 167.2,144.5 ; 167.2,143.5 167.3,143.4 167.3,132.3 ; 167.2,144.5 167.2,145.5 ; 167.2,145.5 167.2,146.5 ; 167.2,146.5 167.2,147.5 ; 167.2,147.5 167.2,148.5 ; 167.2,148.5 167.2,149.5
  other v1: 167.5,142 167.5,144 167.5,146 167.5,148 167.5,150 167.5,152
VCC_9: C8_1.1 C8_2.1 C8_3.1 C8_4.1 C8_5.1 C8_6.1 C8_7.1 C8_8.1 C8_9.1 C8_10.1 pad.M@173,154.5 Q8_3.3 Q8_4.2 Q9_4.3 | length 34.4
  Top Layer w0.2: Q8_3.3@170.9,131.1 171,131.2 172.8,131.2 172.8,132.3 ; C8_1.1 172.7,143.5 ; C8_2.1 172.7,144.5 ; C8_3.1 172.7,145.5 ; C8_4.1 172.7,146.5 ; C8_5.1 172.7,147.5 ; C8_6.1 172.7,148.5 ; C8_7.1 172.7,149.5 ; C8_8.1 172.7,150.5 172.7,149.5 ; C8_9.1 172.7,151.5 ; C8_10.1 172.7,152.5 ; Q8_4.2@171.9,132.4 172,132.5 Q8_4.2@172.1,132.5 ; Q8_4.2 172,132.3 172.8,132.3 ; Q9_4.3@176.5,134.5 Q9_4.3@176.571,134.6 ; 172.7,143.5 172.7,144.5 ; 172.7,143.5 172.8,143.4 172.8,132.3 ; 172.7,144.5 172.7,145.5 ; 172.7,145.5 172.7,146.5 ; 172.7,146.5 172.7,147.5 ; 172.7,147.5 172.7,148.5 ; 172.7,148.5 172.7,149.5
  other v1: 173,142 173,144 173,146 173,148 173,150 173,152
VCC_10: C9_1.1 C9_2.1 C9_3.1 C9_4.1 C9_5.1 C9_6.1 C9_7.1 C9_8.1 C9_9.1 C9_10.1 pad.M@178.5,154.5 Q9_3.3 Q9_4.2 | length 34.3
  Top Layer w0.2: Q9_3.3@176.4,131.1 176.5,131.2 178.3,131.2 178.3,132.3 ; C9_1.1 178.2,143.5 ; C9_2.1 178.2,144.5 ; C9_3.1 178.2,145.5 ; C9_4.1 178.2,146.5 ; C9_5.1 178.2,147.5 ; C9_6.1 178.2,148.5 ; C9_7.1 178.2,149.5 ; C9_8.1 178.2,150.5 178.2,149.5 ; C9_9.1 178.2,151.5 ; C9_10.1 178.2,152.5 ; Q9_4.2@177.4,132.4 177.5,132.5 Q9_4.2@177.6,132.5 ; Q9_4.2 177.5,132.3 178.3,132.3 ; 178.2,143.5 178.2,144.5 ; 178.2,143.5 178.3,143.4 178.3,132.3 ; 178.2,144.5 178.2,145.5 ; 178.2,145.5 178.2,146.5 ; 178.2,146.5 178.2,147.5 ; 178.2,147.5 178.2,148.5 ; 178.2,148.5 178.2,149.5
copper on no net:
  other v1: 178.5,142 178.5,144 178.5,146 178.5,148 178.5,150 178.5,152

## Other copper
Top Layer:
  rectangle net GND: 123,125.5 179,128
  rectangle net VCC_10: 178,152 179.1,155
  rectangle net VCC_9: 172.5,152 173.6,155
  rectangle net VCC_8: 167,152 168.1,155
  rectangle net VCC_7: 161.5,152 162.6,155
  rectangle net VCC_6: 156,152 157.1,155
  rectangle net VCC_5: 150.5,152 151.6,155
  rectangle net VCC_4: 145,152 146.1,155
  rectangle net VCC_1: 128.5,152 129.6,155
  rectangle net VCC_3: 139.5,152 140.6,155
  rectangle net VCC_2: 134,152 135.1,155
  region net VCC_0: 128.3,136.5 126.6,136.5 126.6,134.2 128.3,134.2
  region net VCC_0: 133.8,136.5 132.1,136.5 132.1,135.3 133.8,135.3
  region net VCC_0: 139.3,136.5 137.6,136.5 137.6,135.3 139.3,135.3
  region net VCC_0: 144.8,136.5 143.1,136.5 143.1,135.3 144.8,135.3
  region net VCC_0: 150.3,136.5 148.6,136.5 148.6,135.3 150.3,135.3
  region net VCC_0: 155.8,136.5 154.1,136.5 154.1,135.3 155.8,135.3
  region net VCC_0: 161.3,136.5 159.6,136.5 159.6,135.3 161.3,135.3
  region net VCC_0: 166.8,136.5 165.1,136.5 165.1,135.3 166.8,135.3
  region net VCC_0: 172.3,136.5 170.6,136.5 170.6,135.3 172.3,135.3
  region net VCC_0: 177.8,136.5 176.1,136.5 176.1,135.3 177.8,135.3
  region net VCC_10: 179.1,153 178,153 178,130.9 179.1,130.9
  region net NetC9_1_2: 175,153 173.9,153 173.9,141.3 175,141.3
  region net VCC_10: 178.9,131.4 176.4,131.4 176.4,130.9 178.9,130.9
  region net VCC_10: 178.2,132.6 177.4,132.6 177.4,132.1 178.2,132.1
  region net NetC9_1_2: 175.5,141.9 174.8,141.9 174.8,141.3 175.5,141.3
  region net VCC_9: 177.6,134.9 176.4,134.9 176.4,134.4 177.6,134.4
  region net NetQ9_1_3: 176.7,139.3 176.3,139.3 176.3,138.1 176.7,138.1
  rectangle net VCC_10: 178.8,130.9 180.4,153
  region net VCC_9: 173.6,153 172.5,153 172.5,130.9 173.6,130.9
  region net NetC8_1_2: 169.5,153 168.4,153 168.4,141.3 169.5,141.3
  region net VCC_9: 173.4,131.4 170.9,131.4 170.9,130.9 173.4,130.9
  region net VCC_9: 172.7,132.6 171.9,132.6 171.9,132.1 172.7,132.1
  region net NetC8_1_2: 170,141.9 169.3,141.9 169.3,141.3 170,141.3
  region net VCC_8: 172.1,134.9 170.9,134.9 170.9,134.4 172.1,134.4
  region net NetQ8_1_3: 171.2,139.3 170.8,139.3 170.8,138.1 171.2,138.1
  rectangle net VCC_9: 173.1,133.1 177.6,134.9
  rectangle net VCC_9: 173.3,130.9 174.9,140.8
  region net VCC_8: 168.1,153 167,153 167,130.9 168.1,130.9
  region net NetC7_1_2: 164,153 162.9,153 162.9,141.3 164,141.3
  region net VCC_8: 167.9,131.4 165.4,131.4 165.4,130.9 167.9,130.9
  region net VCC_8: 167.2,132.6 166.4,132.6 166.4,132.1 167.2,132.1
  region net NetC7_1_2: 164.5,141.9 163.8,141.9 163.8,141.3 164.5,141.3
  region net VCC_7: 166.6,134.9 165.4,134.9 165.4,134.4 166.6,134.4
  region net NetQ7_1_3: 165.7,139.3 165.3,139.3 165.3,138.1 165.7,138.1
  rectangle net VCC_8: 167.6,133.1 172.1,134.9
  rectangle net VCC_8: 167.8,130.9 169.4,140.8
  region net VCC_7: 162.6,153 161.5,153 161.5,130.9 162.6,130.9
  region net NetC6_1_2: 158.5,153 157.4,153 157.4,141.3 158.5,141.3
  region net VCC_7: 162.4,131.4 159.9,131.4 159.9,130.9 162.4,130.9
  region net VCC_7: 161.7,132.6 160.9,132.6 160.9,132.1 161.7,132.1
  region net NetC6_1_2: 159,141.9 158.3,141.9 158.3,141.3 159,141.3
  region net VCC_6: 161.1,134.9 159.9,134.9 159.9,134.4 161.1,134.4
  region net NetQ6_1_3: 160.2,139.3 159.8,139.3 159.8,138.1 160.2,138.1
  rectangle net VCC_7: 162.1,133.1 166.6,134.9
  rectangle net VCC_7: 162.3,130.9 163.9,140.8
  region net VCC_3: 140.6,153 139.5,153 139.5,130.9 140.6,130.9
  rectangle net VCC_5: 151.1,133.1 155.6,134.9
  rectangle net VCC_4: 145.6,133.1 150.1,134.9
  rectangle net VCC_3: 140.1,133.1 144.6,134.9
  rectangle net VCC_2: 134.6,133.1 139.1,134.9
  rectangle net VCC_6: 156.8,130.9 158.4,140.8
  rectangle net VCC_6: 156.6,133.1 161.1,134.9
  region net NetQ5_1_3: 154.7,139.3 154.3,139.3 154.3,138.1 154.7,138.1
  region net VCC_5: 155.6,134.9 154.4,134.9 154.4,134.4 155.6,134.4
  region net NetC5_1_2: 153.5,141.9 152.8,141.9 152.8,141.3 153.5,141.3
  region net VCC_6: 156.2,132.6 155.4,132.6 155.4,132.1 156.2,132.1
  region net VCC_6: 156.9,131.4 154.4,131.4 154.4,130.9 156.9,130.9
  region net NetC5_1_2: 153,153 151.9,153 151.9,141.3 153,141.3
  region net VCC_6: 157.1,153 156,153 156,130.9 157.1,130.9
  rectangle net VCC_5: 151.3,130.9 152.9,140.8
  region net NetQ4_1_3: 149.2,139.3 148.8,139.3 148.8,138.1 149.2,138.1
  region net VCC_4: 150.1,134.9 148.9,134.9 148.9,134.4 150.1,134.4
  region net NetC4_1_2: 148,141.9 147.3,141.9 147.3,141.3 148,141.3
  region net VCC_5: 150.7,132.6 149.9,132.6 149.9,132.1 150.7,132.1
  region net VCC_5: 151.4,131.4 148.9,131.4 148.9,130.9 151.4,130.9
  region net NetC4_1_2: 147.5,153 146.4,153 146.4,141.3 147.5,141.3
  region net VCC_5: 151.6,153 150.5,153 150.5,130.9 151.6,130.9
  rectangle net VCC_4: 145.8,130.9 147.4,140.8
  region net NetQ3_1_3: 143.7,139.3 143.3,139.3 143.3,138.1 143.7,138.1
  region net VCC_3: 144.6,134.9 143.4,134.9 143.4,134.4 144.6,134.4
  region net NetC3_1_2: 142.5,141.9 141.8,141.9 141.8,141.3 142.5,141.3
  region net VCC_4: 145.2,132.6 144.4,132.6 144.4,132.1 145.2,132.1
  region net VCC_4: 145.9,131.4 143.4,131.4 143.4,130.9 145.9,130.9
  region net NetC3_1_2: 142,153 140.9,153 140.9,141.3 142,141.3
  region net VCC_4: 146.1,153 145,153 145,130.9 146.1,130.9
  rectangle net VCC_2: 134.8,130.9 136.4,140.8
  region net NetC2_1_2: 136.5,153 135.4,153 135.4,141.3 136.5,141.3
  region net VCC_3: 140.4,131.4 137.9,131.4 137.9,130.9 140.4,130.9
  region net VCC_3: 139.7,132.6 138.9,132.6 138.9,132.1 139.7,132.1
  region net NetC2_1_2: 137,141.9 136.3,141.9 136.3,141.3 137,141.3
  region net VCC_2: 139.1,134.9 137.9,134.9 137.9,134.4 139.1,134.4
  region net NetQ2_1_3: 138.2,139.3 137.8,139.3 137.8,138.1 138.2,138.1
  rectangle net VCC_3: 140.3,130.9 141.9,140.8
  rectangle net VCC_1: 129.3,130.9 130.9,140.8
  rectangle net VCC_1: 129.1,133.1 133.6,134.9
  region net VCC_2: 135.1,153 134,153 134,130.9 135.1,130.9
  region net NetC1_1_2: 131,153 129.9,153 129.9,141.3 131,141.3
  region net VCC_2: 134.9,131.4 132.4,131.4 132.4,130.9 134.9,130.9
  region net VCC_2: 134.2,132.6 133.4,132.6 133.4,132.1 134.2,132.1
  region net NetC1_1_2: 131.5,141.9 130.8,141.9 130.8,141.3 131.5,141.3
  region net VCC_1: 133.6,134.9 132.4,134.9 132.4,134.4 133.6,134.4
  region net NetQ1_1_3: 132.7,139.3 132.3,139.3 132.3,138.1 132.7,138.1
  region net NetQ0_1_3: 127.2,139.3 126.8,139.3 126.8,138.1 127.2,138.1
  region net NetC0_1_2: 126,141.9 125.3,141.9 125.3,141.3 126,141.3
  region net VCC_1: 128.7,132.6 127.9,132.6 127.9,132.1 128.7,132.1
  region net VCC_1: 129.4,131.4 126.9,131.4 126.9,130.9 129.4,130.9
  region net NetC0_1_2: 125.5,153 124.4,153 124.4,141.3 125.5,141.3
  region net VCC_1: 129.6,153 128.5,153 128.5,130.9 129.6,130.9
Bottom Layer:
  rectangle net NetC0_1_2: 124.5,141.5 126.5,153
  rectangle net NetC2_1_2: 135.5,141.5 137.5,153
  rectangle net NetC1_1_2: 130,141.5 132,153
  rectangle net NetC3_1_2: 141,141.5 143,153
  rectangle net NetC4_1_2: 146.5,141.5 148.5,153
  rectangle net NetC5_1_2: 152,141.5 154,153
  rectangle net NetC6_1_2: 157.5,141.5 159.5,153
  rectangle net NetC7_1_2: 163,141.5 165,153
  rectangle net NetC8_1_2: 168.5,141.5 170.5,153
  rectangle net NetC9_1_2: 174,141.5 176,153
  rectangle: 177,141.5 179,153
  rectangle net VCC_9: 171.5,141.5 173.6,153
  rectangle net VCC_8: 166,141.5 168.1,153
  rectangle net VCC_7: 160.5,141.5 162.6,153
  rectangle net VCC_6: 155,141.5 157.1,153
  rectangle net VCC_5: 149.5,141.5 151.6,153
  rectangle net VCC_4: 144,141.5 146.1,153
  rectangle net VCC_3: 138.5,141.5 140.6,153
  rectangle net VCC_2: 133,141.5 135.1,153
  rectangle net VCC_1: 127.5,141.5 129.6,153
  rectangle net VCC_0: 120.5,139.5 123.5,154
  rectangle net VCC_0: 120.5,137.5 133.5,141
  rectangle net GND: 120.5,125.5 127,128.5
  rectangle net GND: 126.5,125.5 179,128.5
  rectangle net VCC_0: 126.5,137.5 178,141
  rectangle net VCC_0: 126.6,135.3 128.3,140
  rectangle net VCC_0: 132.1,135.3 133.8,140
  rectangle net VCC_0: 137.6,135.3 139.3,140
  rectangle net VCC_0: 143.1,135.3 144.8,140
  rectangle net VCC_0: 148.6,135.3 150.3,140
  rectangle net VCC_0: 154.1,135.3 155.8,140
  rectangle net VCC_0: 159.6,135.3 161.3,140
  rectangle net VCC_0: 165.1,135.3 166.8,140
  rectangle net VCC_0: 170.6,135.3 172.3,140
  rectangle net VCC_0: 176.2,135.3 179,141

## Silkscreen, mask and mechanical layers (free items; w line width, h text height)
Top Overlay:
  region: 177.5,141.4
  region: 177.5,141.4
  region: 177.5,141.4
  region: 177.5,141.4
  region: 177.5,141.4
  region: 177.5,141.4
  region: 177.5,141.4
  region: 177.5,141.4
  region: 177.5,141.4
  region: 177.5,141.4
  region: 177.5,141.4
  region: 177.5,141.4
  region: 177.5,141.4
  region: 177.5,141.4
  region: 177.5,141.4
  region: 177.5,141.4
  region: 177.5,141.4
  lines w0.2: 122,145 122,146.5 ; 122,149.5 122,151
  text "V1" at 124.7,153.5 h1.1
  text "V2" at 130.2,153.5 h1.1
  text "V3" at 135.7,153.5 h1.1
  text "V4" at 141.2,153.5 h1.1
  text "V5" at 146.7,153.5 h1.1
  text "V6" at 152.2,153.5 h1.1
  text "V7" at 157.7,153.5 h1.1
  text "V8" at 163.2,153.5 h1.1
  text "V9" at 168.7,153.5 h1.1
  text "V10" at 174.2,153.5 h1.1
  text "V0" at 120.5,147 h1.1
  text "G1" at 120.5,137.5 h1.1
  text "G2" at 120.5,132.5 h1.1
  text "GND" at 124.5,125.5 h1.1
Bottom Overlay:
  text "B" at 182,139 h7
  text "j0ule pump" at 182,133 h1.1
  text "JLCJLCJLCJLC" at 182,124 h1
Board Outline (M30):
  lines w0.2: 119,124 182,124 182,157 119,157 119,124